# Altium PCB Copy3 of PWR_PCB.PcbDoc
Units mil, origin at the board's own origin, x right, y up, seen from the top; angles counter-clockwise.
Board outline 8100 x 5345 mil, 4 copper layers (Top Layer, GND Layer, Power Layer, Bottom Layer), stack 27.912 mil thick; 117 components, 88 nets, 440 pads, 1152 vias.
Unrouted connection lines stored in the file: 9.
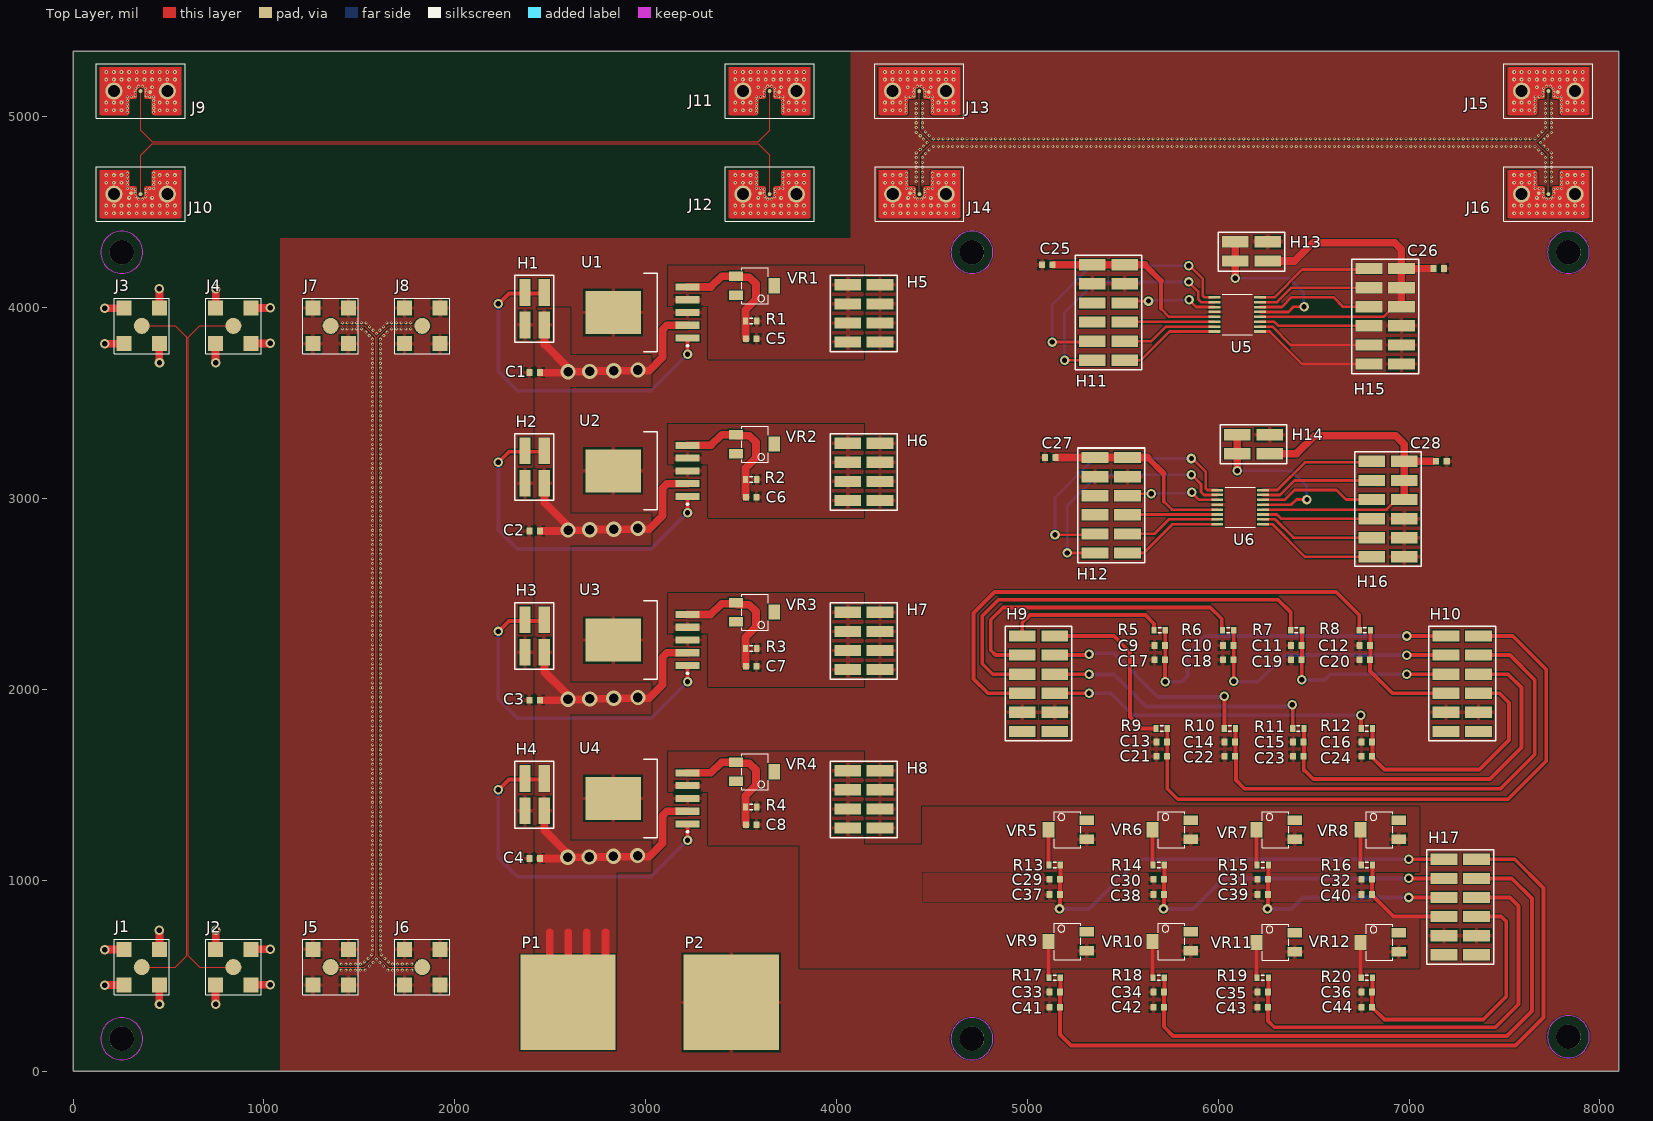
[diagram p0: Top Layer view]
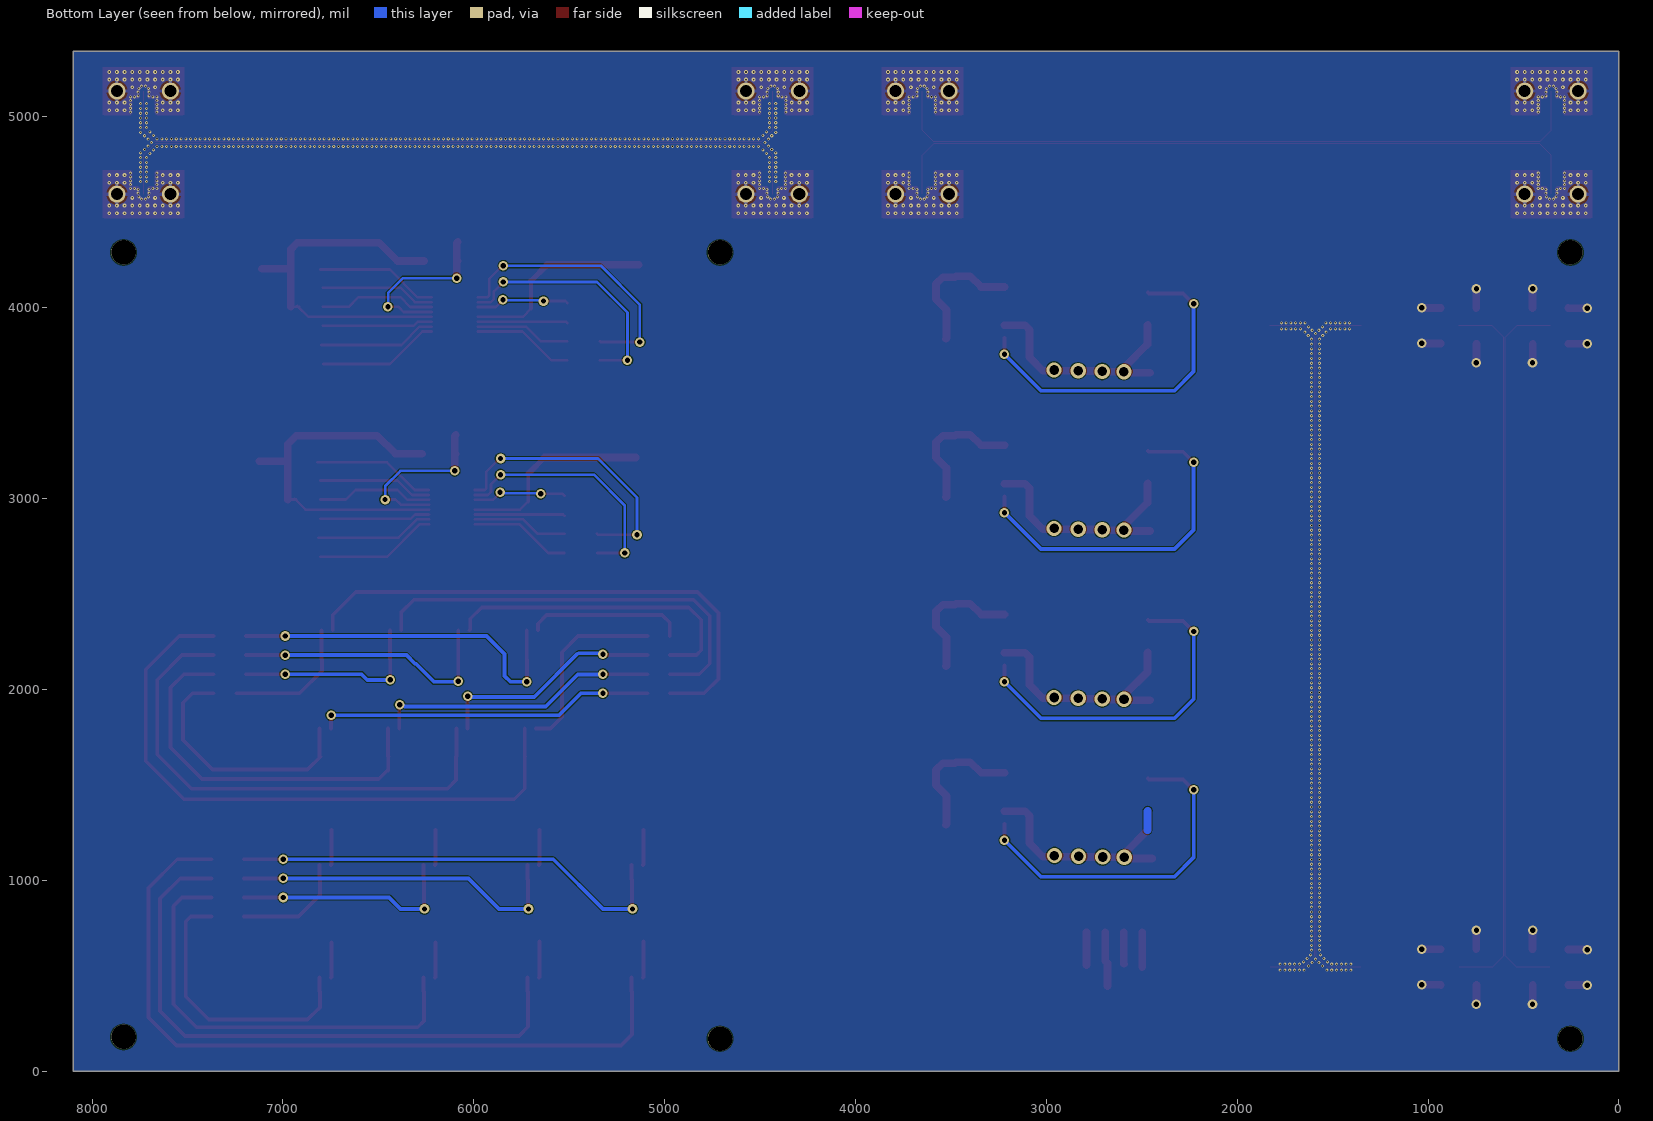
[diagram p1: Bottom Layer view, seen from below]
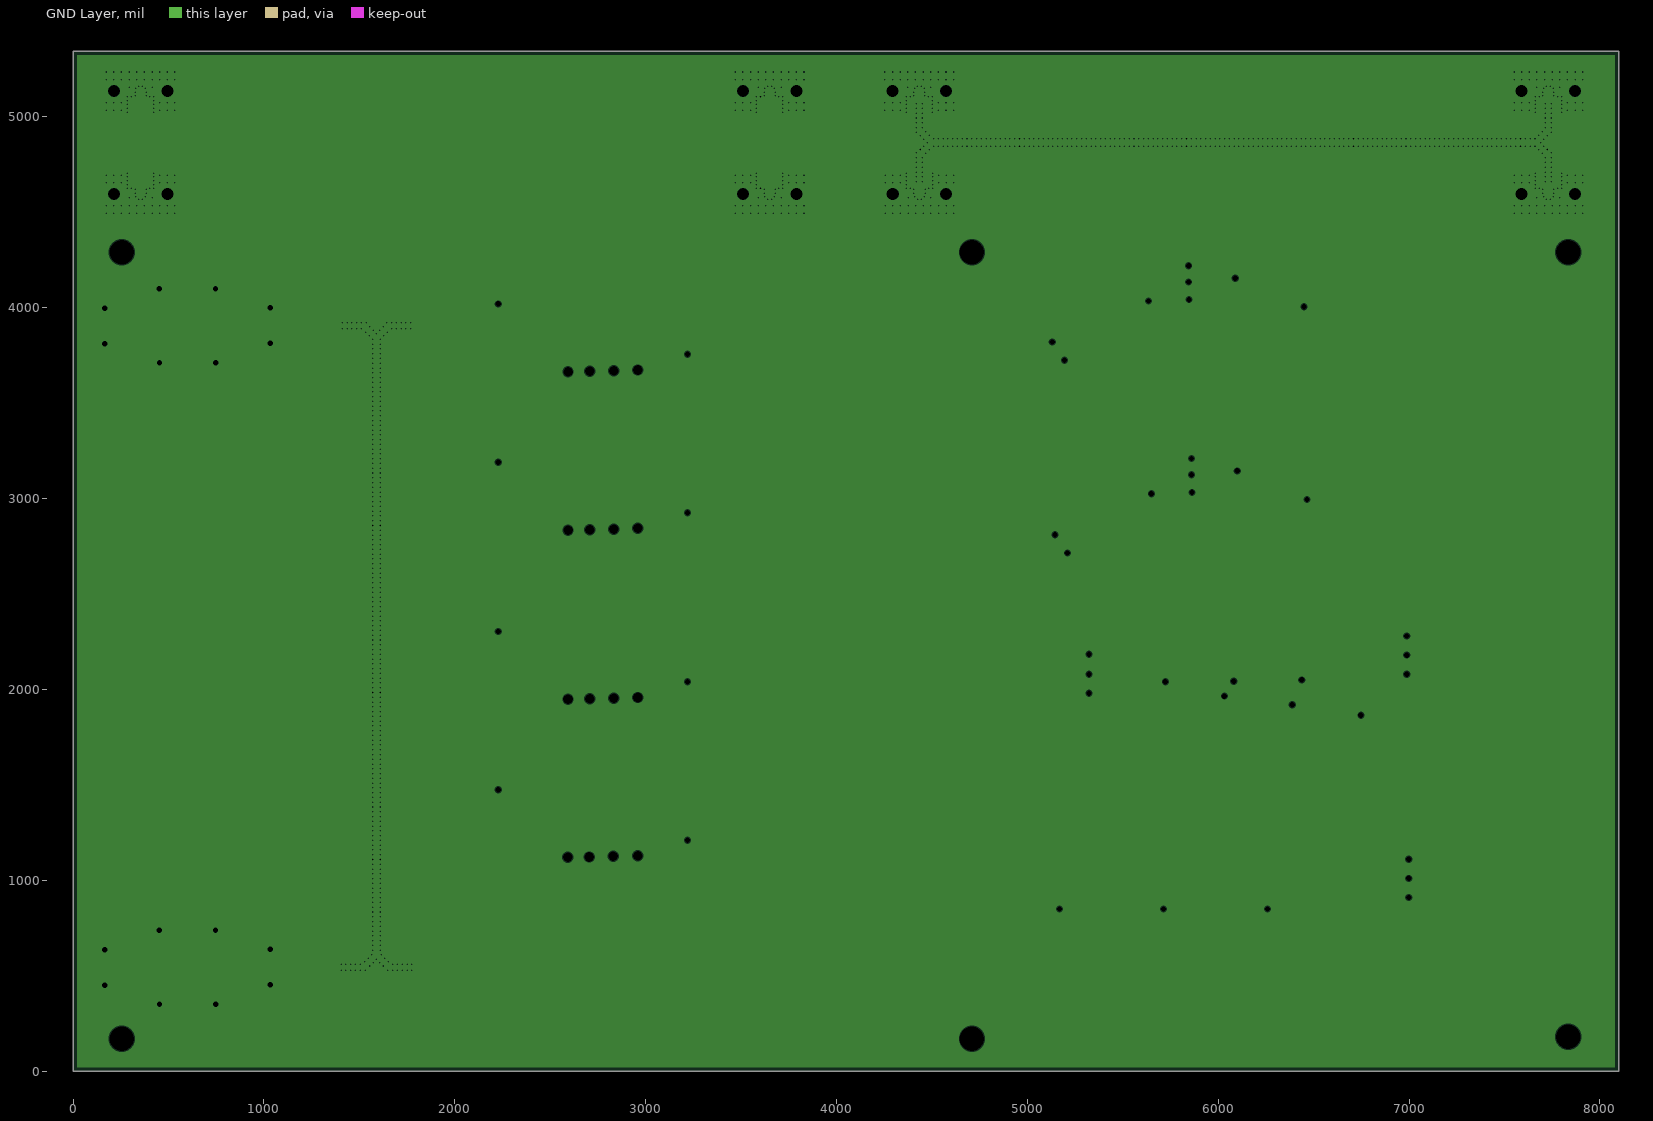
[diagram p2: GND Layer, clearances drawn from the general rule]
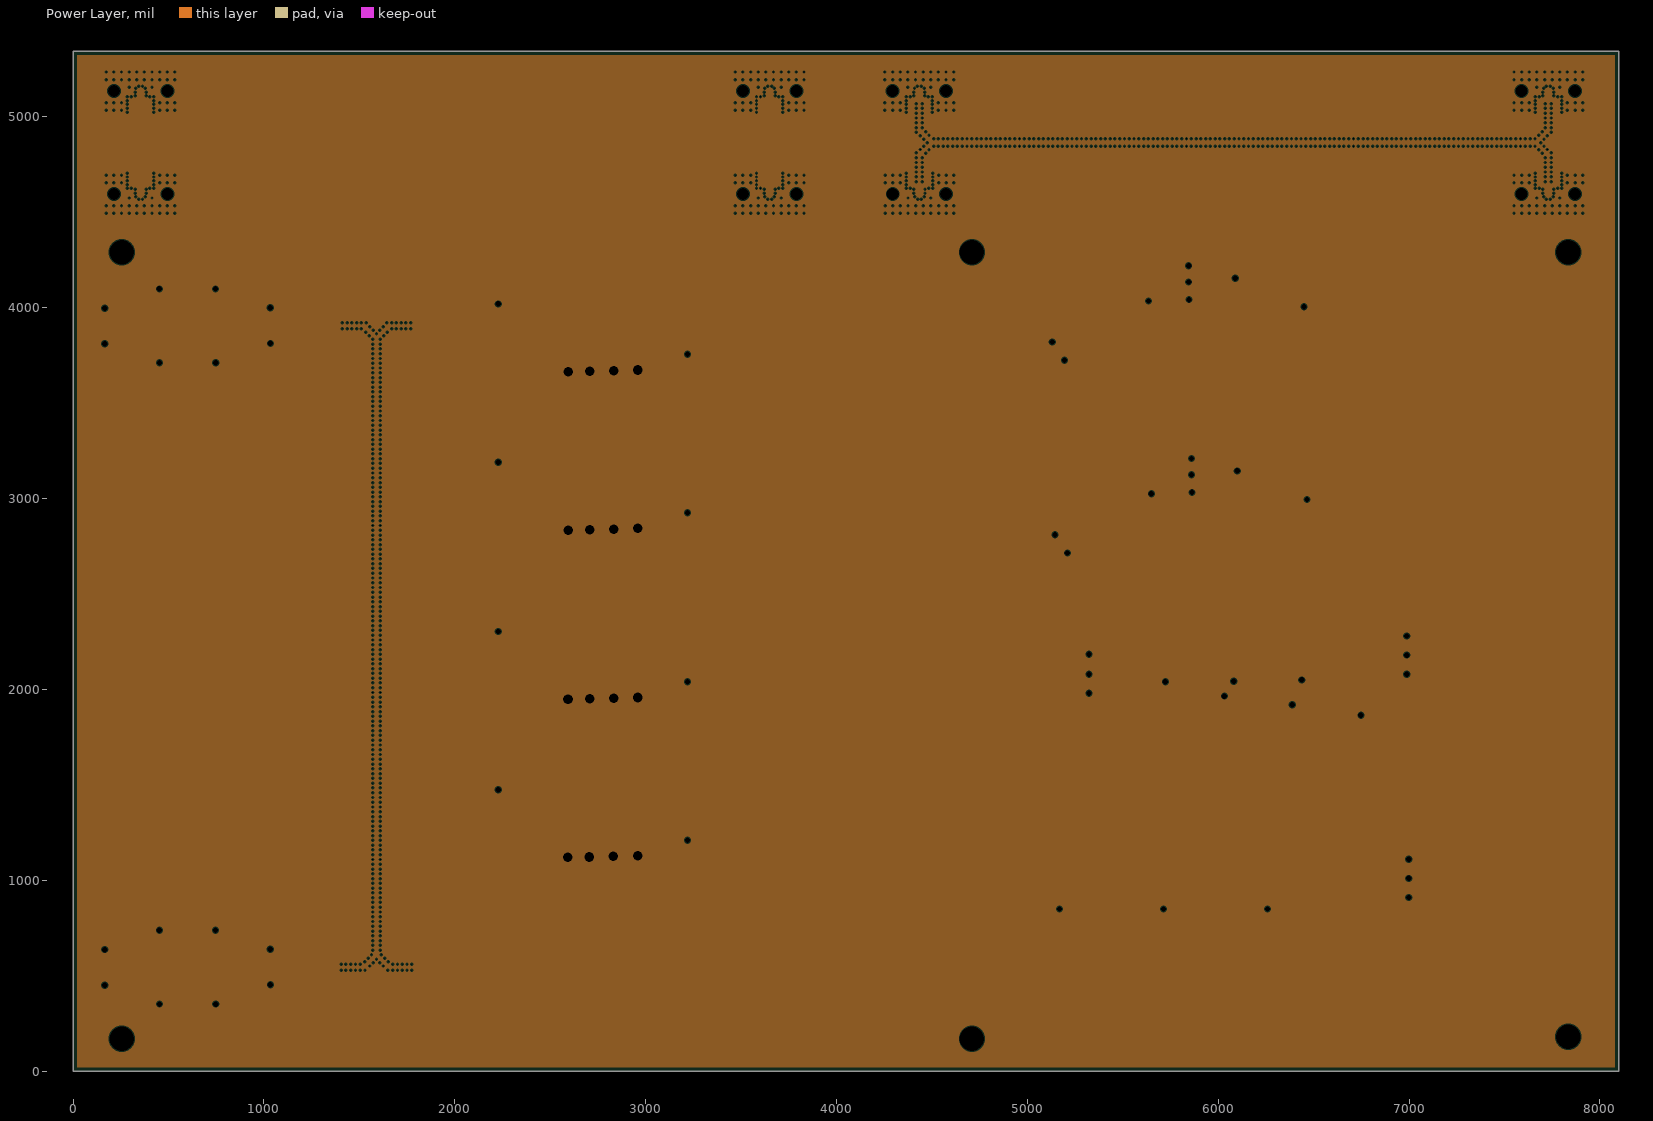
[diagram p3: Power Layer, clearances drawn from the general rule]

## Layer stack, top to bottom
Top Solder: solder mask 0.4, Solder Resist, Dk 3.5
Top Layer: signal copper 1.4
Dielectric 2: prepreg 3.5, PP-001, Dk 4.02
GND Layer: plane copper 2.7559, net GND
Dielectric 1: dielectric 12.6, FR-4, Dk 4.8
Power Layer: plane copper 2.7559, net VDD33
Dielectric 3: prepreg 3.5, PP-001, Dk 4.02
Bottom Layer: signal copper 1.4
Bottom Solder: solder mask 0.4, Solder Resist, Dk 3.5

## Board outline
0,0 0,5345 8100,5345 8100,5 8100,0

## Design rules (kind name [scope] priority, off if disabled: settings)
Clearance [All] p1: gap=5 ignorepadtopadclearanceinfootprint=FALSE
DiffPairsRouting [All] p1: maxlimit=10 minlimit=5 mostfreqgap=10 toplayer_maxgap=5 toplayer_prefgap=5 toplayer_minwidth=4.5 toplayer_maxwidth=5 toplayer_prefwidth=4.5 bottomlayer_mingap=10 bottomlayer_minwidth=15 bottomlayer_maxwidth=15 bottomlayer_prefwidth=15 maxuncoupledlength=500
PlaneClearance [All] p1: clearance=5
PlaneConnect [All] p1: pad.planeconnectstyle=Relief pad.reliefexpansion=20 pad.reliefentries=4 pad.reliefconductorwidth=10 pad.reliefairgap=10 via.planeconnectstyle=Direct via.reliefexpansion=20 via.reliefentries=4 via.reliefconductorwidth=10 via.reliefairgap=10
PolygonConnect [All] p1: thpad.connectstyle=Relief thpad.reliefconductorwidth=20 thpad.reliefentries=4 thpad.polygonreliefangle="90 Angle" thpad.airgapwidth=10 smdpad.connectstyle=Relief smdpad.reliefconductorwidth=20 smdpad.reliefentries=4 smdpad.polygonreliefangle="90 Angle" smdpad.airgapwidth=10 via.connectstyle=Direct via.reliefconductorwidth=10 via.reliefentries=4 via.polygonreliefangle="90 Angle" via.airgapwidth=10
RoutingVias [All] p1: holewidth=28 width=50 viastyle="Through Hole" minholewidth=8 minwidth=16 maxholewidth=28 maxwidth=50
SilkToSolderMaskClearance [IsPad] p1: minsilkscreentomaskgap=2 clearancetoexposedcopper=TRUE
SolderMaskExpansion [All] p1: expansion=4 istentingtop=FALSE
Width [All] p1: maxlimit=40 minlimit=4.5 preferedwidth=20
26 further rules are at their usual default settings.

## Classes and differential pairs
differential pair CK3: +CK3_P -CK3_N
differential pair CK2: +CK2_P -CK2_N
differential pair CK1: +CK1_P -CK1_N
differential pair CK0: +CK0_P -CK0_N

## Components (designator, comment, footprint, x,y, rotation, side; value= is the part's Value field where it differs from the comment)
C1 "Cap Semi" 1608[0603] 2418.5,3660 r0 top value=10uF
C2 "Cap Semi" 1608[0603] 2418.5,2830 r0 top value=10uF
C3 "Cap Semi" 1608[0603] 2418.47,1943.92 r0 top value=10uF
C4 "Cap Semi" 1608[0603] 2418.47,1113.92 r0 top value=10uF
C5 "Cap Semi" 1608[0603] 3553.5,3837.5 r0 top value=3.3nF
C6 "Cap Semi" 1608[0603] 3553.5,3007.5 r0 top value=3.3nF
C7 "Cap Semi" 1608[0603] 3553.47,2121.42 r0 top value=3.3nF
C8 "Cap Semi" 1608[0603] 3553.47,1291.42 r0 top value=3.3nF
C9 "Cap Semi" 1608[0603] 5693.5,2230 r0 top value=10uF
C10 "Cap Semi" 1608[0603] 6051.83,2230 r0 top value=10uF
C11 "Cap Semi" 1608[0603] 6410.17,2230 r0 top value=10uF
C12 "Cap Semi" 1608[0603] 6768.5,2230 r0 top value=10uF
C13 "Cap Semi" 1608[0603] 5703.5,1725 r0 top value=10uF
C14 "Cap Semi" 1608[0603] 6061.83,1725 r0 top value=10uF
C15 "Cap Semi" 1608[0603] 6420.17,1725 r0 top value=10uF
C16 "Cap Semi" 1608[0603] 6778.5,1725 r0 top value=10uF
C17 "Cap Semi" 1608[0603] 5693.5,2155 r0 top value=1uF
C18 "Cap Semi" 1608[0603] 6051.83,2155 r0 top value=1uF
C19 "Cap Semi" 1608[0603] 6410.17,2155 r0 top value=1uF
C20 "Cap Semi" 1608[0603] 6768.5,2155 r0 top value=1uF
C21 "Cap Semi" 1608[0603] 5703.5,1650 r0 top value=1uF
C22 "Cap Semi" 1608[0603] 6061.83,1650 r0 top value=1uF
C23 "Cap Semi" 1608[0603] 6420.17,1650 r0 top value=1uF
C24 "Cap Semi" 1608[0603] 6778.5,1650 r0 top value=1uF
C25 "Cap Semi" 1608[0603] 5105,4225 r0 top value=1uF
C26 "Cap Semi" 1608[0603] 7155,4205 r180 top value=100nF
C27 "Cap Semi" 1608[0603] 5120,3215 r0 top value=1uF
C28 "Cap Semi" 1608[0603] 7170,3195 r180 top value=100nF
C29 "Cap Semi" 1608[0603] 5143.5,1005 r0 top value=10uF
C30 "Cap Semi" 1608[0603] 5688.5,1005 r0 top value=10uF
C31 "Cap Semi" 1608[0603] 6233.5,1005 r0 top value=10uF
C32 "Cap Semi" 1608[0603] 6778.5,1005 r0 top value=10uF
C33 "Cap Semi" 1608[0603] 5143.5,415 r0 top value=10uF
C34 "Cap Semi" 1608[0603] 5688.5,415 r0 top value=10uF
C35 "Cap Semi" 1608[0603] 6233.5,415 r0 top value=10uF
C36 "Cap Semi" 1608[0603] 6778.5,415 r0 top value=10uF
C37 "Cap Semi" 1608[0603] 5143.5,925 r0 top value=1uF
C38 "Cap Semi" 1608[0603] 5688.5,925 r0 top value=1uF
C39 "Cap Semi" 1608[0603] 6233.5,925 r0 top value=1uF
C40 "Cap Semi" 1608[0603] 6778.5,925 r0 top value=1uF
C41 "Cap Semi" 1608[0603] 5143.5,335 r0 top value=1uF
C42 "Cap Semi" 1608[0603] 5688.5,335 r0 top value=1uF
C43 "Cap Semi" 1608[0603] 6233.5,335 r0 top value=1uF
C44 "Cap Semi" 1608[0603] 6778.5,335 r0 top value=1uF
H1 "HEADER_2X2_SMT" HEADER_2X2_SMT 2418.5,3995 r90 top
H2 "HEADER_2X2_SMT" HEADER_2X2_SMT 2418.5,3165 r90 top
H3 "HEADER_2X2_SMT" HEADER_2X2_SMT 2418.47,2279.92 r90 top
H4 "HEADER_2X2_SMT" HEADER_2X2_SMT 2418.47,1448.92 r90 top
H5 "HEADER_2X4_SMT" HEADER_2X4_SMT 4143.5,3970 r180 top
H6 "HEADER_2X4_SMT" HEADER_2X4_SMT 4143.5,3140 r180 top
H7 "HEADER_2X4_SMT" HEADER_2X4_SMT 4143.47,2253.92 r180 top
H8 "HEADER_2X4_SMT" HEADER_2X4_SMT 4143.47,1423.92 r180 top
H9 "HEADER_2X6_SMT" HDR2X6_SMT 5058.5,2030 r0 top
H10 "HEADER_2X6_SMT" HDR2X6_SMT 7278.5,2030 r0 top
H11 "HEADER_2X6_SMT" HDR2X6_SMT 5425,3975 r180 top
H12 "HEADER_2X6_SMT" HDR2X6_SMT 5440,2965 r180 top
H13 "HEADER_2X2_SMT" HEADER_2X2_SMT 6175,4295 r180 top
H14 "HEADER_2X2_SMT" HEADER_2X2_SMT 6185,3285 r180 top
H15 "HEADER_2X6_SMT" HDR2X6_SMT 6875,3955 r180 top
H16 "HEADER_2X6_SMT" HDR2X6_SMT 6890,2945 r180 top
H17 "HEADER_2X6_SMT" HDR2X6_SMT 7268.5,860 r0 top
J1 "Con RF SMA" CON-001-250X250/SMA-SMT 360,545 r90 top
J2 "Con RF SMA" CON-001-250X250/SMA-SMT 840,545 r90 top
J3 "Con RF SMA" CON-001-250X250/SMA-SMT 360,3905 r90 top
J4 "Con RF SMA" CON-001-250X250/SMA-SMT 840,3905 r90 top
J5 "Con RF SMA" CON-001-250X250/SMA-SMT 1350,545 r90 top
J6 "Con RF SMA" CON-001-250X250/SMA-SMT 1830,545 r90 top
J7 "Con RF SMA" CON-001-250X250/SMA-SMT 1350,3905 r90 top
J8 "Con RF SMA" CON-001-250X250/SMA-SMT 1830,3905 r90 top
J9 "CON_K_SMT_2d92" CON_K_SMT_2D92 354,5135 r270 top
J10 "CON_K_SMT_2d92" CON_K_SMT_2D92 354,4595 r90 top
J11 "CON_K_SMT_2d92" CON_K_SMT_2D92 3650,5135 r270 top
J12 "CON_K_SMT_2d92" CON_K_SMT_2D92 3650,4595 r90 top
J13 "CON_K_SMT_2d92" CON_K_SMT_2D92 4434,5135 r270 top
J14 "CON_K_SMT_2d92" CON_K_SMT_2D92 4435,4595 r90 top
J15 "CON_K_SMT_2d92" CON_K_SMT_2D92 7730,5135 r270 top
J16 "CON_K_SMT_2d92" CON_K_SMT_2D92 7730,4595 r90 top
P1 "BANANA_JACK_SMT" BANANA_JACK_SMT 2593.5,360 r0 top
P2 "BANANA_JACK_SMT" BANANA_JACK_SMT 3448.5,360 r0 top
R1 "Res3" J1-0603 3553.5,3930 r0 top value=1.4K
R2 "Res3" J1-0603 3553.5,3100 r0 top value=1.4K
R3 "Res3" J1-0603 3553.47,2213.92 r0 top value=1.4K
R4 "Res3" J1-0603 3553.47,1383.92 r0 top value=1.4K
R5 "Res3" J1-0603 5693.5,2310 r180 top value=1K
R6 "Res3" J1-0603 6051.83,2310 r180 top value=1K
R7 "Res3" J1-0603 6410.17,2310 r180 top value=1K
R8 "Res3" J1-0603 6768.5,2310 r180 top value=1K
R9 "Res3" J1-0603 5703.5,1795 r180 top value=1K
R10 "Res3" J1-0603 6061.83,1795 r180 top value=1K
R11 "Res3" J1-0603 6420.17,1795 r180 top value=1K
R12 "Res3" J1-0603 6778.5,1795 r180 top value=1K
R13 "Res3" J1-0603 5143.5,1080 r180 top value=1K
R14 "Res3" J1-0603 5688.5,1080 r180 top value=1K
R15 "Res3" J1-0603 6233.5,1080 r180 top value=1K
R16 "Res3" J1-0603 6778.5,1080 r180 top value=1K
R17 "Res3" J1-0603 5143.5,490 r180 top value=1K
R18 "Res3" J1-0603 5688.5,490 r180 top value=1K
R19 "Res3" J1-0603 6233.5,490 r180 top value=1K
R20 "Res3" J1-0603 6778.5,490 r180 top value=1K
U1 "LP38511TJ-ADJ" TJ5A_N 2983.5,3975 r180 top
U2 "LP38511TJ-ADJ" TJ5A_N 2983.5,3145 r180 top
U3 "LP38511TJ-ADJ" TJ5A_N 2983.47,2258.92 r180 top
U4 "LP38511TJ-ADJ" TJ5A_N 2983.47,1428.92 r180 top
U5 "MAX13003" MAX13003 6100,3965 r180 top
U6 "MAX13003" MAX13003 6115,2955 r180 top
VR1 "5K" POT_3214_Top 3573.47,4115 r0 top
VR2 "5K" POT_3214_Top 3573.47,3285 r0 top
VR3 "5K" POT_3214_Top 3573.47,2405 r0 top
VR4 "5K" POT_3214_Top 3573.47,1568.92 r0 top
VR5 "5K" POT_3214_Top 5210.69,1265 r180 top
VR6 "5K" POT_3214_Top 5755.69,1265 r180 top
VR7 "5K" POT_3214_Top 6300.69,1265 r180 top
VR8 "5K" POT_3214_Top 6845.69,1265 r180 top
VR9 "5K" POT_3214_Top 5210.69,680 r180 top
VR10 "5K" POT_3214_Top 5755.69,680 r180 top
VR11 "5K" POT_3214_Top 6300.69,675 r180 top
VR12 "5K" POT_3214_Top 6845.69,675 r180 top

## Footprints (in the part's own frame and the unit in brackets; to place one, negate y for a bottom-side part, rotate by r counter-clockwise, add the part's x,y. Pads: shape width x height; smd on the part's side, far side on the other; paste and mask are expansions set on the pad)
1608[0603] [mm] "Chip Capacitor, Body 1.6x0.8mm, IPC High Density"
  rect 0.8x0.9 smd: 1(-0.7,0) 2(0.7,0)
  body extent -0.87,-0.48 0.87,0.48, height 1.3
BANANA_JACK_SMT [mil]
  rect 500x500 smd: 1(0,0)
CON-001-250X250/SMA-SMT [mm]
  round 2.127 smd: 1(0,0)
  rect 2x2 smd: 2(-2.375,2.375) 3(2.375,2.375) 4(2.375,-2.375) 5(-2.375,-2.35)
  silkscreen extent -3.68,-3.68 3.68,3.68, body extent -3.17,-3.17 3.18,3.17, height 9.65
CON_K_SMT_2D92 [mil]
  round 90 hole 63: 1(0,140) 4(0,-140)
  round 19.68 smd paste-9.84 mask+9.84: 2(5,50)
  round 20 smd paste-10: 3(0,0)
  Top Layer region: -125.52,195 125.52,195 125.52,215 -125.52,215
  Top Layer region: -125.52,-215 125.52,-215 125.52,-195 -125.52,-195
  Top Layer region: -125,-205.52 -125.2,-205.48 -125.36,-205.36 -125.48,-205.2 -125.52,-205 -125.52,-205 -125.52,205 -125.46,205.22 -125.32,205.4 -125.11,205.5 -124.89,205.5 -124.68,205.4 -124.54,205.22 -124.48,205 -124.48,205 -124.48,0.51 -20.51,0.51 -17.59,10.55 -10.11,17.85 0,20.51 0,20.51 0.2,20.48 0.36,20.36 0.48,20.2 0.52,20 0.52,20 0.48,19.8 0.36,19.64 0.2,19.52 0,19.49 0,19.49 -7.46,18 -13.78,13.78 -18,7.46 -19.48,0 -19.48,0 -18,-7.46 -13.78,-13.78 -7.46,-18 0,-19.49 0,-19.49 30,-19.49 34.02,-20.29 37.44,-22.56 39.71,-25.98 40.52,-30 40.52,-30 40.49,-30.15 40.43,-30.29 40.43,-30.29 40.49,-30.42 40.52,-30.58 40.52,-30.58 40.52,-50 41.24,-53.63 43.29,-56.71 46.37,-58.76 50,-59.49 50,-59.49 115,-59.48 119.02,-60.29 122.44,-62.56 124.71,-65.98 125.52,-70 125.52,-70 125.52,-205 125.48,-205.2 125.36,-205.36 125.2,-205.48 125,-205.51 125,-205.51
  Top Layer region: -125.52,-205 -125.46,-205.22 -125.32,-205.4 -125.11,-205.5 -124.89,-205.5 -124.68,-205.4 -124.54,-205.22 -124.48,-205 -124.48,-205 -124.48,-0.52 -20.51,-0.51 -17.59,-10.55 -10.11,-17.85 0,-20.51 0,-20.51 0.2,-20.48 0.36,-20.36 0.48,-20.2 0.52,-20 0.52,-20 0.48,-19.8 0.36,-19.64 0.2,-19.52 0,-19.49 0,-19.49 -7.46,-18 -13.78,-13.78 -18,-7.46 -19.48,0 -19.48,0 -18,7.46 -13.78,13.78 -7.46,18 0,19.49 0,19.49 30,19.49 34.02,20.29 37.44,22.56 39.71,25.98 40.52,30 40.52,30 40.52,50 41.24,53.63 43.29,56.71 46.37,58.76 50,59.49 50,59.49 115,59.49 119.02,60.29 122.44,62.56 124.71,65.98 125.52,70 125.52,70 125.52,205 125.48,205.2 125.36,205.36 125.2,205.48 125,205.52 125,205.52 -125,205.51 -125.2,205.48 -125.36,205.36 -125.48,205.2 -125.52,205 -125.52,205
  silkscreen extent -143,-233 143,233
HDR2X6_SMT [mil]
  rect 140x59.06 smd: 1(-85,250) 2(-85,150) 3(-85,50) 4(-85,-50) 5(-85,-150) 6(-85,-250) 7(85,250) 8(85,150) 9(85,50) 10(85,-50) 11(85,-150) 12(85,-250)
  silkscreen extent -175,-300 175,300
HEADER_2X2_SMT [mil]
  rect 140x59.06 smd: 1(-85,50) 2(85,50) 3(-85,-50) 4(85,-50)
  silkscreen extent -175,-101 175,103
HEADER_2X4_SMT [mil]
  rect 140x59.06 smd: 1(-85,150) 2(85,150) 3(-85,50) 4(85,50) 5(-85,-50) 6(85,-50) 7(-85,-150) 8(85,-150)
  silkscreen extent -175,-200 175,200
J1-0603 [mm] "Chip Resistor, Body 1.6x0.8mm, IPC High Density"
  rect 0.7x0.9 smd: 1(-0.75,0) 2(0.75,0)
  silkscreen extent -0.2,-0.35 0.2,0.35, body extent -0.85,-0.48 0.85,0.48, height 0.9
MAX13003 [mil]
  rect 62.5x13.5 smd paste+0 mask+2: 1(-119.75,89.57) 2(-119.75,63.98) 3(-119.75,38.39) 4(-119.75,12.8) 5(-119.75,-12.8) 6(-119.75,-38.39) 7(-119.75,-63.98) 8(-119.75,-89.57) 9(119.75,-89.57) 10(119.75,-63.98) 11(119.75,-38.39) 12(119.75,-12.8) 13(119.75,12.8) 14(119.75,38.39) 15(119.75,63.98) 16(119.75,89.57)
  silkscreen extent -78,-106 78,106
POT_3214_Top [mil] "5 turn Trimpot, 3214, Top adjust"
  rect 75x50 smd: 1(-100,50) 3(-100,-50)
  rect 61x79 smd: 2(100,0)
  silkscreen extent -70,-95 70,95, body extent -70,-95 70,95, height 200
TJ5A_N [mm] "D2-PAK, 6-Leads, Body 9.9x10.2mm, Pitch 1.7mm, Lead Span 14mm, IPC Medium Density"
  rect 3.2x0.95 smd: 1(-6,3.4) 2(-6,1.7) 3(-6,0) 4(-6,-1.7) 5(-6,-3.4)
  rect 7.4x5.75 smd: 6(3.9,0)
  silkscreen extent -6.13,-5.2 -0.2,5.2, body extent -1.95,-5.2 8.15,5.2, height 2.1

## Part data
C1 C2 C3 C4 C5 C6 C7 C8 C9 C10 C11 C12 C13 C14 C15 C16 C17 C18 C19 C20 C21 C22 C23 C24 C25 C26 C27 C28 C29 C30 C31 C32 C33 C34 C35 C36 C37 C38 C39 C40 C41 C42 C43 C44: "Capacitor (Semiconductor SIM Model)", LatestRevisionDate=29-May-2009, LatestRevisionNote="IPC-7351 Footprint Added.", PackageDescription="Chip Capacitor", PackageReference=C1206, Published=8-Jun-2000, Publisher="Altium Limited"
J1 J2 J3 J4 J5 J6 J7 J8: library part CON_RF_SMA
J9 J10 J11 J12 J13 J14 J15 J16: "Con RF K"
R1 R2 R3 R4 R5 R6 R7 R8 R9 R10 R11 R12 R13 R14 R15 R16 R17 R18 R19 R20: "Resistor", LatestRevisionDate=29-May-2009, LatestRevisionNote="IPC-7351 Footprint Added.", PackageDescription="Chip Resistor", PackageReference=J1-0603, Published=8-Jun-2000, Publisher="Altium Limited"
U1 U2 U3 U4: "800 mA Fast-Transient Response Low-Dropout Linear Voltage Regulator with Error Flag, 6-pin TO-263 Thin", Manufacturer="National Semiconductor", PackageTopMarking=NSUZXYTTE#*LP38511*TJ-ADJ, PowerWise=N, ComponentLink1Description="Manufacturer URL", ComponentLink1URL=http://www.national.com/, ComponentLink2Description="LP38511 Datasheet", ComponentLink2URL=http://www.national.com/ds/LP/LP38511-ADJ.pdf, ComponentLink3Description="LP38511 Web Page", ComponentLink3URL=http://www.national.com/pf/LP/LP38511.html, ComponentLink4Description="TJ5A Package Page", ComponentLink4URL=http://www.national.com/packaging/folders/tj5a.html, CompType="LDO IC", DatasheetVersion=Feb-2009, High-Reliability=Y, PackageDescription="Thin TO-263, Molded, 9.85 x 10.16 x 2mm Body, 5 Lead, 1.7mm Pitch, Surface Mount", PackageReference=TJ5A, PackageVersion="revE, Jan-2008", PartNumber=LP38511TJ-ADJ, PinCount=5, RoHS=Y
VR1 VR2 VR3 VR4 VR5 VR6 VR7 VR8 VR9 VR10 VR11 VR12: library part RPot_5K, "Potentiometer", Manufacturer=Bourns, Manufacturer ID=3214X-1-502E, Digikey ID=3214X-1-502ECT-ND

## Free pads (board coordinates)
  round 128.35 hole 128.5 unplated: 0(255,170) 0(255,4290) 0(4710,170) 0(4710,4290) 0(7835,180) 0(7835,4290)

## Via types
v1: diameter 16, hole 8, Top Layer to Bottom Layer, 646 vias
v2: diameter 20, hole 8, Top Layer to Bottom Layer, tented both sides, 272 vias
v3: diameter 16, hole 8, Top Layer to Bottom Layer, tented both sides, 160 vias
v4: diameter 50, hole 28, Top Layer to Bottom Layer, 58 vias
v5: diameter 80, hole 50, Top Layer to Bottom Layer, 16 vias

## Nets (pads, with @x,y where several pads share a name; then routed paths per layer and width w, separated by ;. In a path a pad name is that pad's centre, name@x,y a point inside that pad or via, vN(x,y) a via of type N, cw(c..) or ccw(c..) an arc to the next point about the centre after c; other vN are vias at no path point)
CK0_N: J2.1 J4.1 | length 3759.7
  Top Layer w5: J2.1 665,545 605,605 605,3845 665,3905 J4.1
CK0_P: J1.1 J3.1 | length 3759.7
  Top Layer w5: J1.1 535,545 595,605 595,3845 535,3905 J3.1
CK1_N: J6.1 J8.1 | length 3759.9
  Top Layer w4.5: J6.1 1655,545 1594.75,605.25 1594.75,3844.75 1655,3905 J8.1
CK1_P: J5.1 J7.1 | length 3759.9
  Top Layer w4.5: J5.1 1525,545 1585.25,605.25 1585.25,3844.75 1525,3905 J7.1
CK2_N: J10.3 J12.3 | length 3755.7
  Top Layer w5: J10.3 354,4800 414,4860 3590,4860 3650,4800 J12.3
CK2_P: J9.3 J11.3 | length 3755.7
  Top Layer w5: J9.3 354,4930 414,4870 3590,4870 3650,4930 J11.3
CK3_N: J14.3 J16.3 | length 3756.2
  Top Layer w4.5: J14.3@4434,4595 4434,4800.25 4494,4860.25 7670,4860.25 7730,4800.25 J16.3
CK3_P: J13.3 J15.3 | length 3756.2
  Top Layer w4.5: J13.3 4434,4929.75 4494,4869.75 7670,4869.75 7730,4929.75 J15.3
DIG0_0: H15.7 U5.1 | length 640.8
  Top Layer w14: U5.1 6269.57,3875.43 6440,3705 H15.7
DIG0_1: H16.7 U6.1 | length 640.8
  Top Layer w14: U6.1 6284.57,2865.43 6455,2695 H16.7
DIG0_V33_0: H11.1 U5.16 | length 532.6
  Top Layer w14: H11.1 5595,3725 5745.43,3875.43 U5.16
DIG0_V33_1: H12.1 U6.16 | length 532.6
  Top Layer w14: H12.1 5610,2715 5760.43,2865.43 U6.16
DIG1_0: H15.8 U5.2 | length 620
  Top Layer w14: U5.2 6283.98,3901.02 6380,3805 H15.8 H15.8@6800,3805
DIG1_1: H16.8 U6.2 | length 620
  Top Layer w14: U6.2 6298.98,2891.02 6395,2795 H16.8 H16.8@6815,2795
DIG1_V33_0: H11.2 U5.15 | length 501.7
  Top Layer w14: H11.2 5650,3825 5726.02,3901.02 U5.15
DIG1_V33_1: H12.2 U6.15 | length 501.7
  Top Layer w14: H12.2 5665,2815 5741.02,2891.02 U6.15
DIG2_0: H15.9 U5.3 | length 579.2
  Top Layer w14: U5.3 6293.39,3926.61 6315,3905 H15.9
DIG2_1: H16.9 U6.3 | length 579.2
  Top Layer w14: U6.3 6308.39,2916.61 6330,2895 H16.9
DIG2_V33_0: H11.3 U5.14 | length 473
  Top Layer w14: H11.3@5510,3920 5516.61,3926.61 U5.14
DIG2_V33_1: H12.3 U6.14 | length 473
  Top Layer w14: H12.3@5525,2910 5531.61,2916.61 U6.14
DIG3_0: H15.10 U5.6 | length 612.3
  Top Layer w14: U5.6 6333.39,4003.39 6385,4055 6605,4055 6655,4005 H15.10
DIG3_1: H16.10 U6.6 | length 612.3
  Top Layer w14: U6.6 6348.39,2993.39 6400,3045 6620,3045 6670,2995 H16.10
DIG3_V33_0: H11.4 U5.11 | length 495.6
  Top Layer w14: H11.4 5520,4035 v4(5635,4035) ; v4(5847.5,4042.5) 5847.5,4039.23 5883.34,4003.39 U5.11
  Bottom Layer w14: v4(5635,4035) 5638.75,4038.75 5843.75,4038.75 v4(5847.5,4042.5)
DIG3_V33_1: H12.4 U6.11 | length 495.6
  Top Layer w14: H12.4 5535,3025 v4(5650,3025) ; v4(5862.5,3032.5) 5862.5,3029.23 5898.34,2993.39 U6.11
  Bottom Layer w14: v4(5650,3025) 5653.75,3028.75 5858.75,3028.75 v4(5862.5,3032.5)
DIG4_0: H15.11 U5.7 | length 601.7
  Top Layer w14: U5.7 6308.98,4028.98 6385,4105 H15.11
DIG4_1: H16.11 U6.7 | length 601.7
  Top Layer w14: U6.7 6323.98,3018.98 6400,3095 H16.11
DIG4_V33_0: H11.7 U5.10 | length 1313.9
  Top Layer w14: v4(5195,3725) H11.7 ; v4(5845,4135) 5895,4085 5895,4045 5911.02,4028.98 U5.10
  Bottom Layer w14: v4(5195,3725) 5195,3975 5355,4135 v4(5845,4135)
DIG4_V33_1: H12.7 U6.10 | length 1313.9
  Top Layer w14: v4(5210,2715) H12.7 ; v4(5860,3125) 5910,3075 5910,3035 5926.02,3018.98 U6.10
  Bottom Layer w14: v4(5210,2715) 5210,2965 5370,3125 v4(5860,3125)
DIG5_0: H15.12 U5.8 | length 645.5
  Top Layer w14: U5.8 6294.57,4054.57 6440,4200 6770,4200 6775,4200 H15.12@6805,4200
DIG5_1: H16.12 U6.8 | length 645.5
  Top Layer w14: U6.8 6309.57,3044.57 6455,3190 6785,3190 6790,3190 H16.12@6820,3190
DIG5_V33_0: H11.8 U5.9 | length 1461.9
  Top Layer w14: v4(5130,3820) 5335,3820 H11.8 ; v4(5845,4220) 5850,4220 5920,4150 5920,4062.77 5928.2,4054.57 U5.9
  Bottom Layer w14: v4(5130,3820) 5130,4015 5335,4220 v4(5845,4220)
DIG5_V33_1: H12.8 U6.9 | length 1461.9
  Top Layer w14: v4(5145,2810) 5350,2810 H12.8 ; v4(5860,3210) 5865,3210 5935,3140 5935,3052.77 5943.2,3044.57 U6.9
  Bottom Layer w14: v4(5145,2810) 5145,3005 5350,3210 v4(5860,3210)
EN_LVL_0: H13.2 H13.4 U5.5 | length 896.4
  Top Layer w14: U5.5 6367.8,3977.8 6395,4005 v4(6450,4005)
  Top Layer w40: H13.2@6085,4245 6090,4250 6090,4340 H13.4@6085,4345 ; H13.2@6087.5,4237.97 6090,4235.47 v4(6090,4155)
  Bottom Layer w14: v4@6085,4155 6370,4155 6448.97,4076.03 v4@6448.97,4006.03
EN_LVL_1: H14.2 H14.4 U6.5 | length 897.8
  Top Layer w14: U6.5 6382.8,2967.8 6410,2995 v4(6465,2995)
  Top Layer w40: H14.2@6095,3235 6100,3240 6100,3330 H14.4@6095,3335 ; H14.2@6097.5,3227.97 6100,3225.47 v4(6100,3145)
  Bottom Layer w14: v4(6100,3145) 6385,3145 6463.97,3066.03 6463.97,2996.03 v4(6465,2995)
EN_VDD0: H1.2 H1.4 U1.1 | length 1816.6
  Top Layer w20: v4(2228.5,4020) 2283.5,4075 2368.5,4075 2463.5,4075 H1.4 ; v4(3219.72,3756.22) U1.1
  Bottom Layer w20: v4(2228.5,4020) 2228.5,3665 2328.5,3565 3028.5,3565 v4(3219.72,3756.22)
EN_VDD1: H2.2 H2.4 U2.1 | length 1816.6
  Top Layer w20: v4(2228.5,3190) 2283.5,3245 2368.5,3245 2463.5,3245 H2.4 ; v4(3219.72,2926.22) U2.1
  Bottom Layer w20: v4(2228.5,3190) 2228.5,2835 2328.5,2735 3028.5,2735 v4(3219.72,2926.22)
EN_VDD2: H3.2 H3.4 U3.1 | length 1816.6
  Top Layer w20: v4(2228.47,2303.92) 2283.47,2358.92 2368.47,2358.92 2463.47,2358.92 H3.4@2468.47,2363.92 ; v4(3219.69,2040.14) U3.1
  Bottom Layer w20: v4(2228.47,2303.92) 2228.47,1948.92 2328.47,1848.92 3028.47,1848.92 v4(3219.69,2040.14)
EN_VDD3: H4.2 H4.4 U4.1 | length 1816.6
  Top Layer w20: v4(2228.47,1473.92) 2283.47,1528.92 2368.47,1528.92 2463.47,1528.92 H4.4 ; v4(3219.69,1210.14) U4.1
  Bottom Layer w20: v4(2228.47,1473.92) 2228.47,1118.92 2328.47,1018.92 3028.47,1018.92 v4(3219.69,1210.14)
GND: C1.1 C2.1 C3.1 C4.1 C9.1 C10.1 C11.1 C12.1 C13.1 C14.1 C15.1 C16.1 C17.1 C18.1 C19.1 C20.1 C21.1 C22.1 C23.1 C24.1 C25.1 C26.1 C27.1 C28.1 C29.1 C30.1 C31.1 C32.1 C33.1 C34.1 C35.1 C36.1 C37.1 C38.1 C39.1 C40.1 C41.1 C42.1 C43.1 C44.1 H1.1 H2.1 H3.1 H4.1 H5.1 H5.3 H5.5 H5.7 H6.1 H6.3 H6.5 H6.7 H7.1 H7.3 H7.5 H7.7 H8.1 H8.3 H8.5 H8.7 H9.5 H9.11 H10.5 H10.11 H11.5 H11.11 H12.5 H12.11 H13.3 H14.3 H15.1 H15.2 H15.3 H16.1 H16.2 H16.3 H17.5 H17.11 J1.2 J1.3 J1.4 J1.5 J2.2 J2.3 J2.4 J2.5 J3.2 J3.3 J3.4 J3.5 J4.2 J4.3 J4.4 J4.5 J5.2 J5.3 J5.4 J5.5 J6.2 J6.3 J6.4 J6.5 J7.2 J7.3 J7.4 J7.5 J8.2 J8.3 J8.4 J8.5 J9.1 J9.2 J9.4 J10.1 J10.2 J10.4 J11.1 J11.2 J11.4 J12.1 J12.2 J12.4 J13.1 J13.2 J13.4 J14.1 J14.2 J14.4 J15.1 J15.2 J15.4 J16.1 J16.2 J16.4 P2.1 U1.3 U1.6 U2.3 U2.6 U3.3 U3.6 U4.3 U4.6 U5.12 U6.12 VR1.2 VR2.2 VR3.2 VR4.2 | length 2170.6
  Top Layer w40: v4(165.75,637) 166.5,637.75 265.75,637.75 J1.3 ; v4(165.75,3997) 166.5,3997.75 265.75,3997.75 J3.3 ; v4(166.5,450.75) 167.25,451.5 J1.2 ; v4(166.5,3810.75) 167.25,3811.5 J3.2 ; J1.5 452.52,352.25 v4(453.27,351.5) ; J3.5 452.52,3712.25 v4(453.27,3711.5) ; v4(452.75,738.5) 453.5,737.75 J1.4 ; v4(452.75,4098.5) 453.5,4097.75 J3.4 ; J2.2 746.5,352.25 v4(747.25,351.5) ; J4.2 746.5,3712.25 v4(747.25,3711.5) ; v4(746.73,738.5) 747.48,737.75 J2.3@747.48,638.5 ; v4(746.73,4098.5) 747.48,4097.75 J4.3@747.48,3998.5 ; J2.5@933.5,451.5 934.25,452.25 1033.5,452.25 v4(1034.25,453) ; J2.4 1032.75,638.5 v4(1033.5,639.25) ; J4.5@933.5,3811.5 934.25,3812.25 1033.5,3812.25 v4(1034.25,3813) ; J4.4 1032.75,3998.5 v4(1033.5,3999.25) ; v2(4254,5235) v2(4294,5235) v2(4334,5235) v2(4374,5235) v2(4414,5235) v2(4454,5235) v2(4494,5235) v2(4534,5235) v2(4574,5235) v2(4614,5235) ; J13.4 J13.4@4294.5,5134.5 ; J14.1@4294.5,4595.5 J14.1 ; J16.4 v2(7870,4655) v2(7870,4695) ; v2(7870,5035) v2(7870,5075) J15.1
  other v1: 1405,529 1430,529 1455,529 1480,529 1505,529 1530,529 1650,529 1675,529 1700,529 1725,529 1750,529 1775,529 1554,551 1626,551 1405,561 1430,561 1455,561 1480,561 1505,561 1675,561 1700,561 1725,561 1750,561 1775,561 1572,569 1608,569 1528,573 1652,573 1590,587 1546,591 1634,591 1564,609 1616,609 1570,634 1610,634 1570,659 1610,659 1570,684 1610,684 1570,709 1610,709 1570,734 1610,734 1570,759 1610,759 1570,784 1610,784 1570,809 1610,809 1570,834 1610,834 1570,859 1610,859 1570,884 1610,884 1570,909 1610,909 1570,934 1610,934 1570,959 1610,959 1570,984 1610,984 1570,1009 1610,1009 1570,1034 1610,1034 1570,1059 1610,1059 1570,1084 1610,1084 1570,1109 1610,1109 1570,1134 1610,1134 1570,1159 1610,1159 1570,1184 1610,1184 1570,1209 1610,1209 1570,1234 1610,1234 1570,1259 1610,1259 1570,1284 1610,1284 1570,1309 1610,1309 1570,1334 1610,1334 1570,1359 1610,1359 1570,1384 1610,1384 1570,1409 1610,1409 1570,1434 1610,1434 1570,1459 1610,1459 1570,1484 1610,1484 1570,1509 1610,1509 1570,1534 1610,1534 1570,1559 1610,1559 1570,1584 1610,1584 1570,1609 1610,1609 1570,1634 1610,1634 1570,1659 1610,1659 1570,1684 1610,1684 1570,1709 1610,1709 1570,1734 1610,1734 1570,1759 1610,1759 1570,1784 1610,1784 1570,1809 1610,1809 1570,1834 1610,1834 1570,1859 1610,1859 1570,1884 1610,1884 1570,1909 1610,1909 1570,1934 1610,1934 1570,1959 1610,1959 1570,1984 1610,1984 1570,2009 1610,2009 1570,2034 1610,2034 1570,2059 1610,2059 1570,2084 1610,2084 1570,2109 1610,2109 1570,2134 1610,2134 1570,2159 1610,2159 1570,2184 1610,2184 1570,2209 1610,2209 1570,2234 1610,2234 1570,2259 1610,2259 1570,2284 1610,2284 1570,2309 1610,2309 1570,2334 1610,2334 1570,2359 1610,2359 1570,2384 1610,2384 1570,2409 1610,2409 1570,2434 1610,2434 1570,2459 1610,2459 1570,2484 1610,2484 1570,2509 1610,2509 1570,2534 1610,2534 1570,2559 1610,2559 1570,2584 1610,2584 1570,2609 1610,2609 1570,2634 1610,2634 1570,2659 1610,2659 1570,2684 1610,2684 1570,2709 1610,2709 1570,2734 1610,2734 1570,2759 1610,2759 1570,2784 1610,2784 1570,2809 1610,2809 1570,2834 1610,2834 1570,2859 1610,2859 1570,2884 1610,2884 1570,2909 1610,2909 1570,2934 1610,2934 1570,2959 1610,2959 1570,2984 1610,2984 1570,3009 1610,3009 1570,3034 1610,3034 1570,3059 1610,3059 1570,3084 1610,3084 1570,3109 1610,3109 1570,3134 1610,3134 1570,3159 1610,3159 1570,3184 1610,3184 1570,3209 1610,3209 1570,3234 1610,3234 1570,3259 1610,3259 1570,3284 1610,3284 1570,3309 1610,3309 1570,3334 1610,3334 1570,3359 1610,3359 1570,3384 1610,3384 1570,3409 1610,3409 1570,3434 1610,3434 1570,3459 1610,3459 1570,3484 1610,3484 1570,3509 1610,3509 1570,3534 1610,3534 1570,3559 1610,3559 1570,3584 1610,3584 1570,3609 1610,3609 1570,3634 1610,3634 1570,3659 1610,3659 1570,3684 1610,3684 1570,3709 1610,3709 1570,3734 1610,3734 1570,3759 1610,3759 1570,3784 1610,3784 1570,3809 1610,3809 1570,3835 1610,3835 1552,3854 1628,3854 1590,3864 1534,3872 1646,3872 1572,3882 1608,3882 1411,3889 1436,3889 1461,3889 1486,3889 1511,3889 1669,3889 1694,3889 1719,3889 1744,3889 1769,3889 1554,3900 1626,3900 1411,3921 1436,3921 1461,3921 1486,3921 1511,3921 1536,3921 1644,3921 1669,3921 1694,3921 1719,3921 1744,3921 1769,3921 4418,4661 4450,4661 7714,4661 7746,4661 4418,4686 4450,4686 7714,4686 7746,4686 4418,4711 4450,4711 7714,4711 7746,4711 4418,4736 4450,4736 7714,4736 7746,4736 4418,4761 4450,4761 7714,4761 7746,4761 4418,4786 4450,4786 7714,4786 7746,4786 4467,4809 7697,4809 4418,4811 7746,4811 4485,4827 7679,4827 4439,4829 7725,4829 4509,4845 4534,4845 4559,4845 4584,4845 4609,4845 4634,4845 4659,4845 4684,4845 4709,4845 4734,4845 4759,4845 4784,4845 4809,4845 4834,4845 4859,4845 4884,4845 4909,4845 4934,4845 4959,4845 4984,4845 5009,4845 5034,4845 5059,4845 5084,4845 5109,4845 5134,4845 5159,4845 5184,4845 5209,4845 5234,4845 5259,4845 5284,4845 5309,4845 5334,4845 5359,4845 5384,4845 5409,4845 5434,4845 5459,4845 5484,4845 5509,4845 5534,4845 5559,4845 5584,4845 5609,4845 5634,4845 5659,4845 5684,4845 5709,4845 5734,4845 5759,4845 5784,4845 5809,4845 5834,4845 5859,4845 5884,4845 5909,4845 5934,4845 5959,4845 5984,4845 6009,4845 6034,4845 6059,4845 6084,4845 6109,4845 6134,4845 6159,4845 6184,4845 6209,4845 6234,4845 6259,4845 6284,4845 6309,4845 6334,4845 6359,4845 6384,4845 6409,4845 6434,4845 6459,4845 6484,4845 6509,4845 6534,4845 6559,4845 6584,4845 6609,4845 6634,4845 6659,4845 6684,4845 6709,4845 6734,4845 6759,4845 6784,4845 6809,4845 6834,4845 6859,4845 6884,4845 6909,4845 6934,4845 6959,4845 6984,4845 7009,4845 7034,4845 7059,4845 7084,4845 7109,4845 7134,4845 7159,4845 7184,4845 7209,4845 7234,4845 7259,4845 7284,4845 7309,4845 7334,4845 7359,4845 7384,4845 7409,4845 7434,4845 7459,4845 7484,4845 7509,4845 7534,4845 7559,4845 7584,4845 7609,4845 7634,4845 7660,4845 4457,4847 7707,4847 4475,4865 7689,4865 4457,4883 7707,4883 4509,4885 4534,4885 4559,4885 4584,4885 4609,4885 4634,4885 4659,4885 4684,4885 4709,4885 4734,4885 4759,4885 4784,4885 4809,4885 4834,4885 4859,4885 4884,4885 4909,4885 4934,4885 4959,4885 4984,4885 5009,4885 5034,4885 5059,4885 5084,4885 5109,4885 5134,4885 5159,4885 5184,4885 5209,4885 5234,4885 5259,4885 5284,4885 5309,4885 5334,4885 5359,4885 5384,4885 5409,4885 5434,4885 5459,4885 5484,4885 5509,4885 5534,4885 5559,4885 5584,4885 5609,4885 5634,4885 5659,4885 5684,4885 5709,4885 5734,4885 5759,4885 5784,4885 5809,4885 5834,4885 5859,4885 5884,4885 5909,4885 5934,4885 5959,4885 5984,4885 6009,4885 6034,4885 6059,4885 6084,4885 6109,4885 6134,4885 6159,4885 6184,4885 6209,4885 6234,4885 6259,4885 6284,4885 6309,4885 6334,4885 6359,4885 6384,4885 6409,4885 6434,4885 6459,4885 6484,4885 6509,4885 6534,4885 6559,4885 6584,4885 6609,4885 6634,4885 6659,4885 6684,4885 6709,4885 6734,4885 6759,4885 6784,4885 6809,4885 6834,4885 6859,4885 6884,4885 6909,4885 6934,4885 6959,4885 6984,4885 7009,4885 7034,4885 7059,4885 7084,4885 7109,4885 7134,4885 7159,4885 7184,4885 7209,4885 7234,4885 7259,4885 7284,4885 7309,4885 7334,4885 7359,4885 7384,4885 7409,4885 7434,4885 7459,4885 7484,4885 7509,4885 7534,4885 7559,4885 7584,4885 7609,4885 7634,4885 7660,4885 4439,4901 7725,4901 4485,4903 7679,4903 4418,4919 7746,4919 4467,4921 7697,4921 4418,4944 4450,4944 7714,4944 7746,4944 4418,4969 4450,4969 7714,4969 7746,4969 4418,4994 4450,4994 7714,4994 7746,4994 4418,5019 4450,5019 7714,5019 7746,5019 4418,5044 4450,5044 7714,5044 7746,5044 4418,5069 4450,5069 7714,5069 7746,5069
  other v2: 174,4495 214,4495 254,4495 294,4495 334,4495 374,4495 414,4495 454,4495 494,4495 534,4495 3470,4495 3510,4495 3550,4495 3590,4495 3630,4495 3670,4495 3710,4495 3750,4495 3790,4495 3830,4495 4255,4495 4295,4495 4335,4495 4375,4495 4415,4495 4455,4495 4495,4495 4535,4495 4575,4495 4615,4495 7550,4495 7590,4495 7630,4495 7670,4495 7710,4495 7750,4495 7790,4495 7830,4495 7870,4495 7910,4495 174,4535 214,4535 254,4535 294,4535 334,4535 374,4535 414,4535 454,4535 494,4535 534,4535 3470,4535 3510,4535 3550,4535 3590,4535 3630,4535 3670,4535 3710,4535 3750,4535 3790,4535 3830,4535 4255,4535 4295,4535 4335,4535 4375,4535 4415,4535 4455,4535 4495,4535 4535,4535 4575,4535 4615,4535 7550,4535 7590,4535 7630,4535 7670,4535 7710,4535 7750,4535 7790,4535 7830,4535 7870,4535 7910,4535 294,4575 414,4575 3590,4575 3710,4575 4375,4575 4495,4575 7670,4575 7790,4575 174,4655 214,4655 254,4655 454,4655 494,4655 534,4655 3470,4655 3510,4655 3550,4655 3750,4655 3790,4655 3830,4655 4255,4655 4295,4655 4335,4655 4535,4655 4575,4655 4615,4655 7550,4655 7590,4655 7630,4655 7830,4655 7910,4655 174,4695 214,4695 254,4695 454,4695 494,4695 534,4695 3470,4695 3510,4695 3550,4695 3750,4695 3790,4695 3830,4695 4255,4695 4295,4695 4335,4695 4535,4695 4575,4695 4615,4695 7550,4695 7590,4695 7630,4695 7830,4695 7910,4695 174,5035 214,5035 254,5035 454,5035 494,5035 534,5035 3470,5035 3510,5035 3550,5035 3750,5035 3790,5035 3830,5035 4254,5035 4294,5035 4334,5035 4534,5035 4574,5035 4614,5035 7550,5035 7590,5035 7630,5035 7830,5035 7910,5035 174,5075 214,5075 254,5075 454,5075 494,5075 534,5075 3470,5075 3510,5075 3550,5075 3750,5075 3790,5075 3830,5075 4254,5075 4294,5075 4334,5075 4534,5075 4574,5075 4614,5075 7550,5075 7590,5075 7630,5075 7830,5075 7910,5075 294,5155 414,5155 3590,5155 3710,5155 4374,5155 4494,5155 7670,5155 7790,5155 174,5195 214,5195 254,5195 294,5195 334,5195 374,5195 414,5195 454,5195 494,5195 534,5195 3470,5195 3510,5195 3550,5195 3590,5195 3630,5195 3670,5195 3710,5195 3750,5195 3790,5195 3830,5195 4254,5195 4294,5195 4334,5195 4374,5195 4414,5195 4454,5195 4494,5195 4534,5195 4574,5195 4614,5195 7550,5195 7590,5195 7630,5195 7670,5195 7710,5195 7750,5195 7790,5195 7830,5195 7870,5195 7910,5195 174,5235 214,5235 254,5235 294,5235 334,5235 374,5235 414,5235 454,5235 494,5235 534,5235 3470,5235 3510,5235 3550,5235 3590,5235 3630,5235 3670,5235 3710,5235 3750,5235 3790,5235 3830,5235 7550,5235 7590,5235 7630,5235 7670,5235 7710,5235 7750,5235 7790,5235 7830,5235 7870,5235 7910,5235
  other v3: 344,4569 364,4569 3640,4569 3660,4569 4425,4569 4445,4569 7720,4569 7740,4569 329,4581 379,4581 3625,4581 3675,4581 4410,4581 4460,4581 7705,4581 7755,4581 325,4600 383,4600 3621,4600 3679,4600 4406,4600 4464,4600 7701,4600 7759,4600 325,4620 383,4620 3621,4620 3679,4620 4406,4620 4464,4620 7701,4620 7759,4620 285,4625 306,4625 402,4625 423,4625 3581,4625 3602,4625 3698,4625 3719,4625 4366,4625 4387,4625 4483,4625 4504,4625 7661,4625 7682,4625 7778,4625 7799,4625 285,4645 423,4645 3581,4645 3719,4645 4366,4645 4504,4645 7661,4645 7799,4645 285,4665 423,4665 3581,4665 3719,4665 4366,4665 4504,4665 7661,4665 7799,4665 285,4685 423,4685 3581,4685 3719,4685 4366,4685 4504,4685 7661,4685 7799,4685 285,4705 423,4705 3581,4705 3719,4705 4366,4705 4504,4705 7661,4705 7799,4705 285,5025 423,5025 3581,5025 3719,5025 4365,5025 4503,5025 7661,5025 7799,5025 285,5045 423,5045 3581,5045 3719,5045 4365,5045 4503,5045 7661,5045 7799,5045 285,5065 423,5065 3581,5065 3719,5065 4365,5065 4503,5065 7661,5065 7799,5065 285,5085 423,5085 3581,5085 3719,5085 4365,5085 4503,5085 7661,5085 7799,5085 285,5105 306,5105 402,5105 423,5105 3581,5105 3602,5105 3698,5105 3719,5105 4365,5105 4386,5105 4482,5105 4503,5105 7661,5105 7682,5105 7778,5105 7799,5105 325,5110 383,5110 3621,5110 3679,5110 4405,5110 4463,5110 7701,5110 7759,5110 325,5130 383,5130 3621,5130 3679,5130 4405,5130 4463,5130 7701,5130 7759,5130 329,5149 379,5149 3625,5149 3675,5149 4409,5149 4459,5149 7705,5149 7755,5149 344,5161 364,5161 3640,5161 3660,5161 4424,5161 4444,5161 7720,5161 7740,5161
IREF0: C9.2 C17.2 H10.1 R5.1 | length 1908.6
  Top Layer w20: R5.1 5723.03,2156.97 C17.2 5721.06,2125.15 5721.59,2124.62 5721.59,2041.91 v4(5723.5,2040) ; v4@6983.5,2280 H10.1
  Bottom Layer w20: v4(5723.5,2040) 5808.5,2040 5838.5,2070 5838.5,2185 5933.5,2280 v4@6983.5,2280
  other v4: 6988.5,2280
IREF0_M: H9.1 R5.2 | length 830.4
  Top Layer w20: H9.1 4973.5,2350 5013.5,2390 5618.5,2390 5663.97,2344.53 R5.2
IREF1: C10.2 C18.2 H10.2 R6.1 | length 1442.5
  Top Layer w20: v4@6078.5,2040 v4(6081.36,2042.86) R6.1 ; v4(6988.5,2180) H10.2
  Bottom Layer w20: v4(6081.36,2042.86) 6083.27,2040.95 6090.35,2040.95 6091.29,2040 6208.5,2040 6303.5,2135 6308.5,2135 6353.5,2180 v4(6988.5,2180)
IREF1_M: H9.2 R6.2 | length 1658.7
  Top Layer w20: H9.2 4833.5,2180 4808.5,2205 4808.5,2365 4873.5,2430 5958.5,2430 6018.5,2370 6018.5,2313.81 R6.2
IREF2: C11.2 C19.2 H10.3 R7.1 | length 1033.6
  Top Layer w20: v4(6438.5,2050) 6437.73,2050.77 C19.2 6439.69,2156.97 R7.1 ; v4@6983.5,2080 H10.3
  Bottom Layer w20: v4(6438.5,2050) 6558.5,2050 6588.5,2080 v4@6983.5,2080 ; v4@6986,2080 v4@6991,2080
  other v4: 6988.5,2080
IREF2_M: H9.3 R7.2 | length 2255.8
  Top Layer w20: H9.3 4818.5,2080 4763.5,2135 4763.5,2385 4848.5,2470 6313.5,2470 6380.64,2402.86 R7.2
IREF3: C12.2 C20.2 H10.4 R8.1 | length 709.5
  Top Layer w20: R8.1 6798.03,2230 6798.03,2156.97 C20.2 6796.06,2097.44 6913.5,1980 H10.4 H10.4@7243.5,1980
IREF3_M: H9.4 R8.2 | length 2826.5
  Top Layer w20: H9.4 4793.5,1980 4718.5,2055 4718.5,2400 4828.5,2510 6618.5,2510 6738.97,2389.53 R8.2
IREF4: C13.2 C21.2 H10.7 R9.1 | length 3309
  Top Layer w20: C21.2 5733.03,1651.97 5733.03,1725 R9.1 ; C21.2@5733.5,1645.06 5733.5,1480 5788.5,1425 7518.5,1425 7718.5,1625 7718.5,2105 7543.5,2280 H10.7
IREF4_M: H9.7 R9.2 | length 985.5
  Top Layer w20: H9.7@5088.5,2280 5453.5,2280 5538.5,2195 5538.5,1855 5598.5,1795 R9.2
IREF5: C14.2 C22.2 H10.8 R10.1 | length 2669.6
  Top Layer w20: R10.1 6091.36,1725 6091.36,1651.97 C22.2 6093.5,1645.89 6093.5,1525 6138.5,1480 7478.5,1480 7658.5,1660 7658.5,2050 7528.5,2180 H10.8
IREF5_M: H9.8 R10.2 | length 1200.5
  Top Layer w20: H9.8@5088.5,2180 5315.79,2180 5320.79,2185 v4(5323.5,2185) ; R10.2 6033.5,1796.19 6032.31,1797.39 6032.31,1964.81 v4(6032.5,1965)
  Bottom Layer w20: v4(5323.5,2185) 5328.5,2190 5448.5,2190 ; 5458.5,2185 5683.5,1960 6023.5,1960 v4@6028.5,1965
IREF6: C15.2 C23.2 H10.9 R11.1 | length 2014.7
  Top Layer w20: 6448.5,1575 6448.5,1649.23 C23.2 6449.69,1651.97 6449.69,1725 R11.1 ; 6451.69,1576.81 6498.5,1530 7423.5,1530 7588.5,1695 7588.5,2010 7518.5,2080 H10.9
IREF6_M: H9.9 R11.2 | length 1500.4
  Top Layer w20: H9.9@5088.5,2080 H9.9 v4(5323.5,2080) ; v4(6388.5,1920) 6390.41,1918.09 6390.41,1845.38 6390.64,1845.16 R11.2
  Bottom Layer w20: v4(5323.5,2080) 5325.41,2078.09 5455.41,2078.09 5623.5,1910 6361.78,1910 6366.04,1914.26 6382.76,1914.26 v4(6388.5,1920)
IREF7: C16.2 C24.2 H10.10 R12.1 | length 1331.2
  Top Layer w20: C24.2@6803.56,1647.5 6871.06,1580 ; C24.2 6808.03,1651.97 6808.03,1725 R12.1 ; 6873.5,1580 7368.5,1580 7523.5,1735 7523.5,1930 7473.5,1980 H10.10
IREF7_M: H9.10 R12.2 | length 1777.3
  Top Layer w20: H9.10@5088.5,1980 v4(5323.5,1980) ; v4(6747.67,1865) 6748.97,1863.7 R12.2
  Bottom Layer w20: v4(5323.5,1980) 5438.5,1980 5553.5,1865 v4(6747.67,1865)
IREF8: C29.2 C37.2 H17.1 R13.1 | length 2379.6
  Top Layer w20: v4(5168.5,850) 5170.41,851.91 5170.41,924.35 C37.2 C29.2 5173.03,1006.97 R13.1 ; v4@6993.5,1110 v4(6998.5,1110) H17.1 H17.1@7203.5,1110
  Bottom Layer w20: v4(5168.5,850) 5323.5,850 5583.5,1110 v4(6998.5,1110)
IREF8_M: R13.2 VR5.2 | length 186.4
  Top Layer w20: VR5.2 5110.69,1083.28 R13.2
IREF9: C30.2 C38.2 H17.2 R14.1 | length 1788.1
  Top Layer w20: v4(5713.5,850) 5715.41,851.91 5715.41,924.35 C38.2 C30.2 5718.03,1006.97 R14.1 ; v4(6998.5,1010) H17.2 H17.2@7203.5,1010
  Bottom Layer w20: v4(5713.5,850) 5868.5,850 6028.5,1010 v4(6998.5,1010)
IREF9_M: R14.2 VR6.2 | length 186.4
  Top Layer w20: VR6.2 5655.69,1083.28 R14.2
IREF10: C31.2 C39.2 H17.3 R15.1 | length 1209.2
  Top Layer w20: v4(6258.5,850) 6260.41,851.91 6260.41,924.35 C39.2 C31.2 6263.03,1006.97 R15.1 ; v4@6993.5,910 v4(6998.5,910) H17.3 H17.3@7203.5,910
  Bottom Layer w20: v4(6258.5,850) 6383.5,850 6443.5,910 v4(6998.5,910) v4@7001,910
IREF10_M: R15.2 VR7.2 | length 186.4
  Top Layer w20: VR7.2 6200.69,1083.28 R15.2
IREF11: C32.2 C40.2 H17.4 R16.1 | length 602
  Top Layer w20: R16.1 6808.03,1006.97 C32.2 C40.2 6806.06,923.03 6919.09,810 H17.4 H17.4@7203.5,810
IREF11_M: R16.2 VR8.2 | length 186.4
  Top Layer w20: VR8.2 6745.69,1083.28 R16.2
IREF12: C33.2 C41.2 H17.7 R17.1 | length 3987.2
  Top Layer w20: R17.1 5173.03,416.97 C33.2 C41.2 5171.06,192.44 5228.5,135 7558.5,135 7704.01,280.51 7704.01,959.49 7553.5,1110 H17.7@7373.5,1110
IREF12_M: R17.2 VR9.2 | length 191.4
  Top Layer w20: VR9.2 5110.69,493.28 R17.2
IREF13: C34.2 C42.2 H17.8 R18.1 | length 3163.2
  Top Layer w20: R18.1 5718.03,416.97 C34.2 C42.2 5716.06,232.44 5763.5,185 7513.5,185 7644.01,315.51 7644.01,904.49 7538.5,1010 H17.8@7373.5,1010
IREF13_M: R18.2 VR10.2 | length 191.4
  Top Layer w20: VR10.2 5655.69,493.28 R18.2
IREF14: C35.2 C43.2 H17.9 R19.1 | length 2338
  Top Layer w20: R19.1 6263.03,416.97 C35.2 C43.2 6261.06,262.44 6293.5,230 7453.5,230 7574.01,350.51 7574.01,864.49 7528.5,910 H17.9@7373.5,910
IREF14_M: R19.2 VR11.2 | length 186.4
  Top Layer w20: VR11.2 6200.69,493.28 R19.2
IREF15: C36.2 C44.2 H17.10 R20.1 | length 1476.8
  Top Layer w20: R20.1 6808.03,416.97 C36.2 C44.2 6806.06,333.03 6811.81,327.28 6813.78,327.28 6871.06,270 7388.5,270 7509.01,390.51 7509.01,784.49 7483.5,810 H17.10@7373.5,810
IREF15_M: R20.2 VR12.2 | length 186.4
  Top Layer w20: VR12.2 6745.69,493.28 R20.2
NC0: VR1.3
NC1: VR2.3
NC2: VR3.3
NC3: VR4.3
NetC5_1: C5.1 R1.1 U1.5 VR1.1 | length 709.9
  Top Layer w40: U1.5 3342.36,4108.86 3398.5,4165 VR1.1 3478.5,4160 3543.5,4160 3578.5,4125 3578.5,4045 3523.5,3990 3523.5,3839.94 C5.1
NetC6_1: C6.1 R2.1 U2.5 VR2.1 | length 709.9
  Top Layer w40: U2.5 3342.36,3278.86 3398.5,3335 VR2.1 3478.5,3330 3543.5,3330 3578.5,3295 3578.5,3215 3523.5,3160 3523.5,3009.94 C6.1
NetC7_1: C7.1 R3.1 U3.5 VR3.1 | length 709.9
  Top Layer w40: U3.5 3342.33,2392.78 3398.47,2448.92 3473.47,2448.92 3478.47,2443.92 3543.47,2443.92 3578.47,2408.92 3578.47,2328.92 3523.47,2273.92 3523.47,2123.86 C7.1
NetC8_1: C8.1 R4.1 U4.5 VR4.1 | length 709.9
  Top Layer w40: U4.5 3342.33,1562.78 3398.47,1618.92 VR4.1 3478.47,1613.92 3543.47,1613.92 3578.47,1578.92 3578.47,1498.92 3523.47,1443.92 3523.47,1293.86 C8.1
VDD0: C5.2 H5.2 H5.4 H5.6 H5.8 R1.2 U1.4
VDD1: C6.2 H6.2 H6.4 H6.6 H6.8 R2.2 U2.4
VDD2: C7.2 H7.2 H7.4 H7.6 H7.8 R3.2 U3.4
VDD3: C8.2 H8.2 H8.4 H8.6 H8.8 R4.2 U4.4 VR5.1 VR6.1 VR7.1 VR8.1 VR9.1 VR10.1 VR11.1 VR12.1
VDD12_0: C26.2 H13.1 H15.4 H15.5 H15.6 U5.4 | length 1963.3
  Top Layer w14: U5.4 6867.2,3952.2 H15.4@6920,4005 ; H15.4@6914.53,4005 H15.4@6920,4005 ; H15.4@6924.88,4009.88 H15.4@6920,4005 ; H15.4@6945,4005 H15.4@6920,4005
  Top Layer w40: H13.1 6400,4245 6495,4340 6925,4340 6960,4305 H15.6 ; H15.4 H15.5 H15.6 ; 7110,4205 H15.6
VDD12_1: C28.2 H14.1 H16.4 H16.5 H16.6 U6.4 | length 1962.5
  Top Layer w14: U6.4 6882.2,2942.2 H16.4@6935,2995 ; H16.4@6929.53,2995 H16.4@6935,2995 ; H16.4@6939.88,2999.88 H16.4@6935,2995 ; H16.4@6960,2995 H16.4@6935,2995
  Top Layer w40: H14.1 6410,3235 6505,3330 6930,3330 6975,3285 H16.6 ; H16.4 H16.5 H16.6 ; 7125,3195 H16.6
VDD33: C1.2 C2.2 C3.2 C4.2 H1.3 H2.3 H3.3 H4.3 P1.1 U1.2 U2.2 U3.2 U4.2 | length 5861.1
  Top Layer w40: C4.2 2584.72,1113.92 v5(2591.59,1120.8) 2592.24,1121.44 2704.66,1121.44 v5(2705.3,1122.09) ; C3.2@2456.03,1943.92 2588.62,1943.92 v5(2593.55,1948.85) ; C2.2@2456.06,2830 2588.65,2830 v5(2593.58,2834.92) ; C1.2@2456.06,3660 2588.65,3660 v5(2593.58,3664.92) ; H4.3 2468.47,1263.45 v5@2583.94,1147.98 ; H3.3@2468.47,2193.92 2470.42,2191.97 2470.42,2091.5 2585.89,1976.03 2585.89,1956.5 v5(2593.55,1948.85) ; H2.3 2470.45,3078.05 2470.45,2977.57 2585.92,2862.1 2585.92,2842.58 v5(2593.58,2834.92) ; H1.3 2470.45,3908.05 2470.45,3807.57 2585.92,3692.1 2585.92,3672.58 v5(2593.58,3664.92) ; P1.1@2497.5,545 2497.5,727.34 ; P1.1@2593.5,563.5 2595,565 2595,727.34 ; P1.1@2680,446.5 P1.1@2680,565 ; P1.1@2692.5,577.5 2692.5,727.34 ; v5@2707.26,1117.63 2711.65,1122.03 2831.58,1122.03 2833.47,1123.92 3018.47,1123.92 3088.47,1193.92 3088.47,1338.56 3111.9,1361.99 U4.2 ; P1.1@2790,556.5 2790,727.34 ; U3.2 3111.9,2191.99 3088.47,2168.56 3088.47,2023.92 3018.47,1953.92 v5(2833.47,1953.92) 2831.58,1952.03 2711.65,1952.03 2707.26,1947.63 2594.76,1947.63 v5(2593.55,1948.85) ; U2.2 3111.93,3078.07 3088.5,3054.64 3088.5,2910 3018.5,2840 v5(2833.5,2840) 2831.61,2838.11 2711.68,2838.11 2707.29,2833.71 2594.79,2833.71 v5(2593.58,2834.92) ; U1.2 3111.93,3908.07 3088.5,3884.64 3088.5,3740 3018.5,3670 v5(2833.5,3670) 2831.61,3668.11 2711.68,3668.11 2707.29,3663.71 2594.79,3663.71 v5(2593.58,3664.92)
  Bottom Layer w40: 2468.47,1363.92 2470.42,1361.97 2470.42,1261.5
  other v5: 2831.52,1125.88 2957.73,1129.66 2707.26,1950.13 2959.68,1957.71 2707.29,2836.21 2959.71,2843.79 2707.29,3666.21 2959.71,3673.79
VDD33_FPGA_0: C25.2 H11.6 H11.12 U5.13 | length 1040.7
  Top Layer w14: 5700,3995 5742.8,3952.2 U5.13
  Top Layer w20: 5700,3995 5700,4140
  Top Layer w30: 5615,4225 5700,4140
  Top Layer w40: C25.2@5137.44,4225 H11.12 H11.6 5615,4225
VDD33_FPGA_1: C27.2 H12.6 H12.12 U6.13 | length 1040.7
  Top Layer w14: 5715,2985 5757.8,2942.2 U6.13
  Top Layer w20: 5715,2985 5715,3130
  Top Layer w30: 5630,3215 5715,3130
  Top Layer w40: C27.2@5152.44,3215 H12.12 H12.6 5630,3215
pads on no net: H9.6 H9.12 H10.6 H10.12 H11.9 H11.10 H12.9 H12.10 H17.6 H17.12 VR5.3 VR6.3 VR7.3 VR8.3 VR9.3 VR10.3 VR11.3 VR12.3

## Polygon pours and split planes (outlines as drawn)
GND on Top Layer "GND_L01_P018" (solid, pour order 18): 4075,5345 4075,4365 8100,4365 8100,5345
GND on Top Layer "GND_L01_P017" (solid, remove dead copper, pour order 17): 1085,4365 1085,0 8100,0 8100,4365
VDD3 on Top Layer "Top Layer-VDD3" (solid, remove dead copper, pour order 9): 3808.5,540 7053.5,540 7053.5,880 4448.5,880 4448.5,1045 7053.5,1045 7053.5,1385 4448.5,1385 4448.5,1185 4143.47,1185 4143.47,1673.92 3118.47,1673.92 3118.47,1463.92 3328.47,1463.92 3328.47,1183.92 3808.5,1183.92
VDD33 on Top Layer "Top Layer-No Net" (solid, remove dead copper, pour order 16): 2420,565 2845,565 2845,1041.42 3029.97,1041.42 3029.97,1206.42 2605,1206.42 2605,1868.92 3029.97,1868.92 3029.97,2033.92 2605,2033.92 2605,2755 3030,2755 3030,2920 2605,2920 2605,3585 3030,3585 3030,3750 2605,3750 2605,4000 2420,4000
VDD0 on Top Layer "VDD0_L01_P000" (solid, pour order 0): 3118.5,4010 3328.5,4010 3328.5,3730 4143.5,3730 4143.5,4220 3118.5,4220
VDD1 on Top Layer "VDD1_L01_P001" (solid, pour order 1): 3118.5,3180 3328.5,3180 3328.5,2900 4143.5,2900 4143.5,3390 3118.5,3390
VDD2 on Top Layer "VDD2_L01_P002" (solid, pour order 2): 3118.47,2293.92 3328.47,2293.92 3328.47,2013.92 4143.47,2013.92 4143.47,2503.92 3118.47,2503.92
GND on Bottom Layer "GND_L04_P019" (solid, pour order 19): 8100,5345 8100,0 0,0 0,5345
VDD33 on Power Layer (split plane): 8079.9,20.1 20.1,20.1 20.1,5324.9 8079.9,5324.9
GND on GND Layer (split plane): 8079.9,20.1 20.1,20.1 20.1,5324.9 8079.9,5324.9

## Keep-outs
Top Layer:
  region: 4600,4290 ccw(c4710,4290) 4710,4180 ccw(c4710,4290) 4820,4290 ccw(c4710,4290) 4710,4400 ccw(c4710,4290)
  region: 7725,4290 ccw(c7835,4290) 7835,4180 ccw(c7835,4290) 7945,4290 ccw(c7835,4290) 7835,4400 ccw(c7835,4290)
  region: 7725,180 ccw(c7835,180) 7835,70 ccw(c7835,180) 7945,180 ccw(c7835,180) 7835,290 ccw(c7835,180)
  region: 4600,170 ccw(c4710,170) 4710,60 ccw(c4710,170) 4820,170 ccw(c4710,170) 4710,280 ccw(c4710,170)
  region: 145,170 ccw(c255,170) 255,60 ccw(c255,170) 365,170 ccw(c255,170) 255,280 ccw(c255,170)
  region: 145,4290 ccw(c255,4290) 255,4180 ccw(c255,4290) 365,4290 ccw(c255,4290) 255,4400 ccw(c255,4290)

## Silkscreen, mask and mechanical layers (free items; w line width, h text height)
Top Solder:
  lines w60: 294.5,5739.25 294.5,5944.25 354.5,6004.25 3530.5,6004.25 3590.5,5944.25 3590.5,5739.25 ; 294.5,6279.25 294.5,6074.25 354.5,6014.25 3530.5,6014.25 ; 354,4595 354,4800 414,4860 3590,4860 3650,4800 3650,4595 ; 354,5135 354,4930 414,4870 3590,4870 ; 360,545 535,545 595,605 595,3845 535,3905 360,3905 ; 840,545 665,545 605,605 605,3845 665,3905 840,3905 ; 1350,545 1525,545 1585,605 1585,3845 1525,3905 1350,3905 ; 1830,545 1655,545 1595,605 1595,3845 1655,3905 1830,3905 ; 4434,4595 4434,4800 4494,4860 7670,4860 7730,4800 7730,4595 ; 4434,5135 4434,4930 4494,4870 7670,4870 ; 8917.75,266 9092.75,266 9152.75,326 9152.75,3566 9092.75,3626 8917.75,3626 ; 9397.75,266 9222.75,266 9162.75,326 9162.75,3566 9222.75,3626 9397.75,3626 ; 3530.5,6014.25 3590.5,6074.25 ; 3530.5,6014.25 3590.5,6074.25 ; 3590,4870 3650,4930 ; 3590,4870 3650,4930 ; 3590.5,6074.25 3590.5,6279.25 3590.5,6074.25 ; 3650,4930 3650,5135 3650,4930 ; 7670,4870 7730,4930 ; 7670,4870 7730,4930 ; 7730,4930 7730,5135 7730,4930
Mechanical 1:
  lines w10: 8100,0 0,0 0,5345 8100,5345 8100,5